# EAGLE board Four Storied Elevator (EAGLE 9.7.0)

Size 262.49 x 187.4 mm. Coordinates in mm from the lower left corner, seen from the top.
Outline: 0,0 262.49,0 262.49,187.4 0,187.4 0,0
Copper layers (1*16): Top 0.035mm / dielectric 1.5mm / Bottom 0.035mm
Design rules "default": minimum track width 6mil, minimum drill 0.35mm, track to track 6mil, track to pad 6mil, pad to pad 6mil, via to via 6mil, smd to smd 6mil, copper to edge 40mil, drill to drill 6mil, minimum pad ring 10mil, minimum via ring 8mil, stop-mask expansion 4mil, vias tented up to drill 0mil, thermal gap 10mil

## Footprints (pad centres in the part's own frame; a part is rotated, then mirrored left to right if it is on the bottom)
LEDRD254W60D565H860B = drill 0.981 pad 1.581: 1 -1.27,0; 2 1.27,0
MOTOR = drill 1.118 pad 3.15 octagon: + 2.54,0; - -2.54,0
BATTERY-GENERIC = drill 1.118 pad 3.15 octagon: + 2.54,0; - -2.54,0
RESAD1016W63L850D250B = drill 0.83 pad 1.43: 1 -5.08,0; 2 5.08,0
1X02 = drill 1.016 long: 1 -1.27,0; 2 1.27,0
GL5528 = drill 0.8 pad 1.4: 1 -1.702,0; 2 1.702,0
SWITCH-MOMENTARY-PTH-6.5MM = drill 1.016 pad 1.88: 1 -3.251,2.261; 2 3.251,2.261; 3 -3.251,-2.261; 4 3.251,-2.261
ARDUINO-UNO-R3-SHIELD = drill 1.016 pad 1.88: 3.3V 24.13,-2.54; 5V 24.13,0; A0 24.13,12.7; A1 24.13,15.24; A2 24.13,17.78; A3 24.13,20.32; A4 24.13,22.86; A5 24.13,25.4; AREF -24.13,-13.97; D2 -24.13,20.32; D3 -24.13,17.78; D4 -24.13,15.24; D5 -24.13,12.7; D6 -24.13,10.16; D7 -24.13,7.62; D8 -24.13,3.81; D9 -24.13,1.27; D10 -24.13,-1.27; D11 -24.13,-3.81; D12 -24.13,-6.35; D13 -24.13,-8.89; GND@0 24.13,2.54; GND@1 24.13,5.08; GND@2 -24.13,-11.43; IOREF 24.13,-7.62; NC 24.13,-10.16; RES 24.13,-5.08; RX -24.13,25.4; SCL -24.13,-19.05; SDA -24.13,-16.51; TX -24.13,22.86; VIN 24.13,7.62
DIP762W53P254L1969H508Q16B = drill 0.743 pad 1.343: 1 -3.81,8.89; 2 -3.81,6.35; 3 -3.81,3.81; 4 -3.81,1.27; 5 -3.81,-1.27; 6 -3.81,-3.81; 7 -3.81,-6.35; 8 -3.81,-8.89; 9 3.81,-8.89; 10 3.81,-6.35; 11 3.81,-3.81; 12 3.81,-1.27; 13 3.81,1.27; 14 3.81,3.81; 15 3.81,6.35; 16 3.81,8.89
LCD-I2C = drill 1.016 long: 1 -19.05,-5.08; 2 -19.05,-7.62; 3 -19.05,-10.16; 4 -19.05,-12.7
TO220V = drill 1.016 long: 1 -2.54,-2.54; 2 0,-2.54; 3 2.54,-2.54

## Placement (x,y rotation side)
D1  RED  [LEDRD254W60D565H860B]  137.7,147.32 330 top
D2  RED  [LEDRD254W60D565H860B]  137.7,137.16 330 top
D3  RED  [LEDRD254W60D565H860B]  137.7,127 330 top
D4  RED  [LEDRD254W60D565H860B]  137.7,116.84 330 top
M1  MOTOR_HDR  [MOTOR]  188.45,101.51 270 top
M2  MOTOR_HDR  [MOTOR]  189,63.88 270 top
P1  BATTERYGENERIC  [BATTERY-GENERIC]  17.01,67.42 180 top
R1  220  [RESAD1016W63L850D250B]  123.9,147.96 0 top
R2  220  [RESAD1016W63L850D250B]  123.9,137.79 0 top
R3  220  [RESAD1016W63L850D250B]  123.9,127.64 0 top
R4  220  [RESAD1016W63L850D250B]  123.9,117.47 0 top
R5  FORCE-SENSOR  [1X02]  118.82,45.09 270 top
R6  10k  [RESAD1016W63L850D250B]  141.68,36.2 0 top
R7  PHOTOCELL_GL5528  [GL5528]  136.6,24.77 270 top
R8  10k  [RESAD1016W63L850D250B]  106.12,23.5 0 top
S1  SWITCH_MOMENTARY  [SWITCH-MOMENTARY-PTH-6.5MM]  122.63,153.03 0 top
S2  SWITCH_MOMENTARY  [SWITCH-MOMENTARY-PTH-6.5MM]  122.63,142.88 0 top
S3  SWITCH_MOMENTARY  [SWITCH-MOMENTARY-PTH-6.5MM]  122.63,132.72 0 top
S4  SWITCH_MOMENTARY  [SWITCH-MOMENTARY-PTH-6.5MM]  122.63,122.56 0 top
S5  SWITCH_MOMENTARY  [SWITCH-MOMENTARY-PTH-6.5MM]  122.63,8.26 0 top
S6  SWITCH_MOMENTARY  [SWITCH-MOMENTARY-PTH-6.5MM]  122.63,18.41 0 top
U1  ARDUINO-UNO-R3-SHIELD  [ARDUINO-UNO-R3-SHIELD]  29.84,136.16 180 top
U2  L293E  [DIP762W53P254L1969H508Q16B]  122.63,90.81 0 top
U3  LCD-16X2-I2CSUNFOUNDER-IIC  [LCD-I2C]  206.86,179.86 0 top
U4  LM7805_TO220V  [TO220V]  113.74,66.67 270 top

## Library data of the parts
D1-D4 = Tinkercad; CATEGORY: Opto-Electronic; SUB-CATEGORY: LED; VALUE: LED_RED
M1 M2 P1 R1-R8 S1-S6 U1-U4 = Tinkercad

## Nets
D1_A: D1.1 R1.2
D2_A: D2.1 R2.2
D3_A: D3.1 R3.2
D4_A: D4.1 R4.2
M1_+: M1.+ U2.3
M1_-: M1.- U2.6
M2_+: M2.+ U2.11
M2_-: M2.- U2.14
P1+: P1.+ U2.8 U4.1
P1-: D1.2 D2.2 D3.2 D4.2 P1.- R6.2 R7.1 S1.3 S1.4 S2.3 S2.4 S3.3 S3.4 S4.3 S4.4 S5.3 S5.4 S6.3 S6.4 U1.GND@0 U1.GND@1 U1.GND@2 U2.4 U2.5 U2.12 U2.13 U3.1 U4.2
R5_1: R5.1 R8.1
U1_5V: U1.5V U2.9 U2.16 U3.2 U4.3
U1_A0: S6.1 S6.2 U1.A0
U1_A1: S5.1 S5.2 U1.A1
U1_A2: R7.2 R8.2 U1.A2
U1_A3: R5.2 R6.1 U1.A3
U1_A4: U1.A4 U3.3
U1_A5: U1.A5 U3.4
U1_D2: S3.1 S3.2 U1.D2
U1_D3: U1.D3 U2.1
U1_D4: S2.1 S2.2 U1.D4
U1_D5: S1.1 S1.2 U1.D5
U1_D6: R4.1 U1.D6
U1_D7: R3.1 U1.D7
U1_D8: R2.1 U1.D8
U1_D9: R1.1 U1.D9
U1_D10: U1.D10 U2.10
U1_D11: U1.D11 U2.15
U1_D12: U1.D12 U2.2
U1_D13: U1.D13 U2.7
U1_TX: S4.1 S4.2 U1.TX

## Tracks (layer width: path | path; a pad name or v marks a point on that pad's centre or on a via)
D1_A  (1 unrouted)
D2_A  (1 unrouted)
D3_A  (1 unrouted)
D4_A  (1 unrouted)
M1_+  (1 unrouted)
M1_-  (1 unrouted)
M2_+  (1 unrouted)
M2_-  (1 unrouted)
P1+  (2 unrouted)
P1-  (27 unrouted)
R5_1  (1 unrouted)
U1_5V  (4 unrouted)
U1_A0  (2 unrouted)
U1_A1  (2 unrouted)
U1_A2  (2 unrouted)
U1_A3  (2 unrouted)
U1_A4  (1 unrouted)
U1_A5  (1 unrouted)
U1_D2  (2 unrouted)
U1_D3  (1 unrouted)
U1_D4  (2 unrouted)
U1_D5  (2 unrouted)
U1_D6  (1 unrouted)
U1_D7  (1 unrouted)
U1_D8  (1 unrouted)
U1_D9  (1 unrouted)
U1_D10  (1 unrouted)
U1_D11  (1 unrouted)
U1_D12  (1 unrouted)
U1_D13  (1 unrouted)
U1_TX  (2 unrouted)